# Altium PCB dev_board_layout.PcbDoc (part 2 of 3)
Units mm, origin at the board's own origin, x right, y up, seen from the top; angles counter-clockwise.
Board outline 75.44 x 30.86 mm, 2 copper layers (Top Layer, Bottom Layer); 166 components, 99 nets, 533 pads, 297 vias.
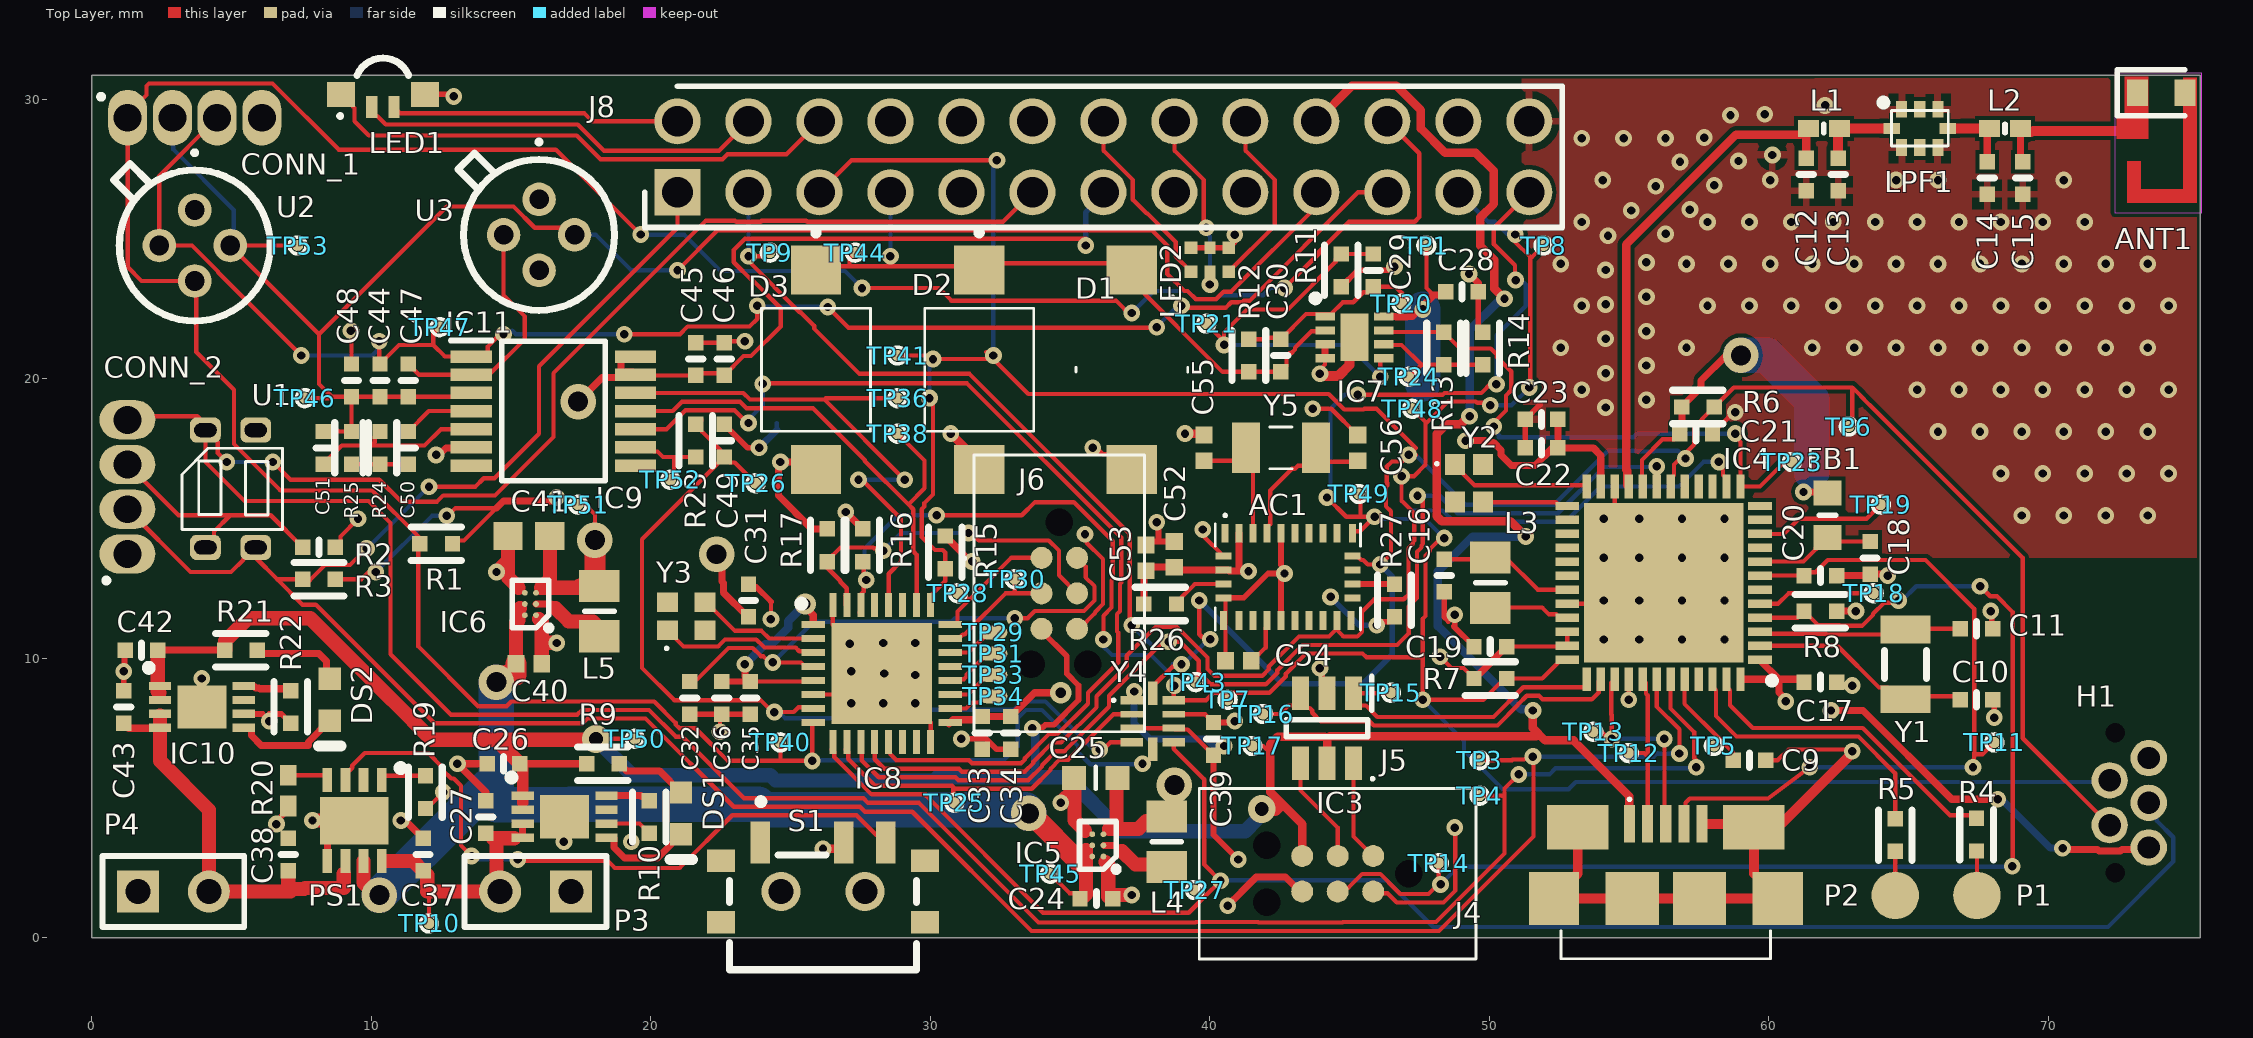
[diagram p0: Top Layer view]

## Part data (continued)
R19: library part ERJ-2GEJ105X, "RES SMD 1M OHM 5% 1/10W 0402", Digi-Key Part Number=P1.0MJCT-ND, Manufacturer="Panasonic Electronic Components", Operating Temperature="-55°C ~ 155°C", Package / Case="0402 (1005 Metric)", Power (Watts)="0.1W, 1/10W", Supplier Device Package=0402, Temperature Coefficient=±200ppm/°C, Tolerance=±5%, @ qty=1500, Composition="Thick Film", Datasheets=http://industrial.panasonic.com/www-cgi/jvcr13pz.cgi?E+PZ+3+AOA0001+ERJ2GEJ105X+7+WW, Factory Stock=0, Failure Rate=-, Features="Automotive AEC-Q200", Height - Seated (Max)="0.016\" (0.40mm)", Image=//media.digikey.com/Photos/Panasonic%20Photos/ERJ-PA2-Series.jpg, Minimum Quantity=1, Number of Terminations=2, Packaging="Cut Tape (CT)", Part Number=ERJ-2GEJ105X, Part Status=Active, Quantity Available=1082572, Series=ERJ, Size / Dimension="0.039\" L x 0.020\" W (1.00mm x 0.50mm)", Unit Price (USD)=0.00350
R20: "Resistor", Manufacturer_Name=Panasonic, Mouser Part Number=667-ERJ-2RKF7500X, Allied_Number=70265602, Allied Price/Stock=https://www.alliedelec.com/panasonic-erj-2rkf7500x/70265602/, Datasheet Link=https://industrial.panasonic.com/cdbs/www-data/pdf/RDA0000/AOA0000C86.pdf, Height=0.4mm, Manufacturer_Part_Number=ERJ-2RKF7500X
R24 R25: library part ERJ-2GEJ164X, "RES SMD 160K OHM 5% 1/10W 0402", Digi-Key Part Number=P160KJCT-ND, Manufacturer="Panasonic Electronic Components", Operating Temperature="-55°C ~ 155°C", Package / Case="0402 (1005 Metric)", Power (Watts)="0.1W, 1/10W", Supplier Device Package=0402, Temperature Coefficient=±200ppm/°C, Tolerance=±5%, @ qty=1500, Composition="Thick Film", Datasheets=http://industrial.panasonic.com/www-cgi/jvcr13pz.cgi?E+PZ+3+AOA0001+ERJ2GEJ164X+7+WW, Factory Stock=0, Failure Rate=-, Features="Automotive AEC-Q200", Height - Seated (Max)="0.016\" (0.40mm)", Image=//media.digikey.com/Photos/Panasonic%20Photos/ERJ-PA2-Series.jpg, Minimum Quantity=1, Number of Terminations=2, Packaging="Cut Tape (CT)", Part Number=ERJ-2GEJ164X, Part Status=Active, Quantity Available=64191, Series=ERJ, Size / Dimension="0.039\" L x 0.020\" W (1.00mm x 0.50mm)", Unit Price (USD)=0.00350
R27: library part ERJ-2GEJ103X, "RES SMD 0K OHM 5% 1/10W 0402", Digi-Key Part Number=P10KJCT-ND, Manufacturer="Panasonic Electronic Components", Operating Temperature="-55°C ~ 155°C", Package / Case="0402 (1005 Metric)", Power (Watts)="0.1W, 1/10W", Supplier Device Package=0402, Temperature Coefficient=±200ppm/°C, Tolerance=±5%, @ qty=1500, Composition="Thick Film", Datasheets=http://industrial.panasonic.com/www-cgi/jvcr13pz.cgi?E+PZ+3+AOA0001+ERJ2GEJ103X+7+WW, Factory Stock=0, Failure Rate=-, Features="Automotive AEC-Q200", Height - Seated (Max)="0.016\" (0.40mm)", Image=//media.digikey.com/Photos/Panasonic%20Photos/ERJ-PA2-Series.jpg, Minimum Quantity=1, Number of Terminations=2, Packaging="Cut Tape (CT)", Part Number=ERJ-2GEJ103X, Part Status=Active, Quantity Available=2560215, Series=ERJ, Size / Dimension="0.039\" L x 0.020\" W (1.00mm x 0.50mm)", Unit Price (USD)=0.00350
S1: "Switch", Manufacturer_Name="C & K COMPONENTS", Mouser Part Number=611-PCM12SMTR, RS Part Number=7931721P, Allied_Number=70417448, Allied Price/Stock=https://www.alliedelec.com/c-k-pcm12smtr/70417448/, Datasheet Link=http://www.farnell.com/datasheets/1789487.pdf, Manufacturer_Part_Number=PCM12SMTR, Mouser Price/Stock=https://www.mouser.com/Search/Refine.aspx?Keyword=611-PCM12SMTR, RS Price/Stock=http://uk.rs-online.com/web/p/products/7931721P
U1: "IR Emitter and Receiver"
U2 U3: "Undefined or Miscellaneous", Manufacturer_Name="Amphenol Advanced Sensors", Mouser Part Number=527-ZTP-135SR, Allied_Number=70282698, Allied Price/Stock=https://www.alliedelec.com/amphenol-advanced-sensors-ztp-135sr/70282698/, Datasheet Link=https://www.amphenol-sensors.com/en/component/edocman/370-thermopile-ir-sensor-applications/download?Itemid=7967, Manufacturer_Part_Number=ZTP-135SR, Mouser Price/Stock=https://www.mouser.com/Search/Refine.aspx?Keyword=527-ZTP-135SR
Y1: "Crystal or Oscillator", Manufacturer_Name=NDK, Mouser Part Number=344-NX3215SA32768K8, Datasheet Link=http://www.ndk.com/images/products/catalog/c_NX3215SA-STD-MUA-14_e.pdf, Manufacturer_Part_Number=NX3215SA-32.768K-STD-MUA-8, Mouser Price/Stock=https://www.mouser.com/Search/Refine.aspx?Keyword=344-NX3215SA32768K8
Y2 Y3: "Crystal or Oscillator", Manufacturer_Name="Murata Electronics", Mouser Part Number=81-XRCGB32M000F1H01R, Datasheet Link=https://www.murata.com/en-eu/products/productdetail?partno=XRCGB32M000F1H01R0, Height=0.7mm, Manufacturer_Part_Number=XRCGB32M000F1H01R0, Mouser Price/Stock=https://www.mouser.com/Search/Refine.aspx?Keyword=81-XRCGB32M000F1H01R
Y4: "Crystal or Oscillator", Manufacturer_Name="Texas Instruments", Mouser Part Number=595-ADS1015IRUGT, RS Part Number=7321496, Datasheet Link=http://www.ti.com/lit/ds/symlink/ads1015.pdf, Height=0mm, Manufacturer_Part_Number=ADS1015IRUGT, Mouser Price/Stock=https://www.mouser.com/Search/Refine.aspx?Keyword=595-ADS1015IRUGT, RS Price/Stock=https://uk.rs-online.com/web/p/products/7321496
Y5: library part FC-135_32.7680KA-A3, "Crystal or Oscillator", Manufacturer_Name="Epson Timing", Manufacturer_Part_Number="FC-135 32.7680KA-A5", Mouser Part Number=732-FC135-32.76KAA3, Datasheet Link=https://support.epson.biz/td/api/doc_check.php?dl=brief_fc-135r_en.pdf, Height=0mm, Mouser Price/Stock=https://www.mouser.com/Search/Refine.aspx?Keyword=732-FC135-32.76KAA3

## Via types
v1: diameter 0.6, hole 0.3, Top Layer to Bottom Layer, tented both sides, 260 vias
v2: diameter 0.6, hole 0.3, Top Layer to Bottom Layer, tented bottom, 25 vias
v3: diameter 1.27, hole 0.711, Top Layer to Bottom Layer, tented both sides, 8 vias
v4: diameter 0.762, hole 0.381, Top Layer to Bottom Layer, tented both sides, 2 vias
v5: diameter 1, hole 0.5, Top Layer to Bottom Layer, tented both sides, 2 vias

## Nets (pads, with @x,y where several pads share a name; then routed paths per layer and width w, separated by ;. In a path a pad name is that pad's centre, name@x,y a point inside that pad or via, vN(x,y) a via of type N, cw(c..) or ccw(c..) an arc to the next point about the centre after c; other vN are vias at no path point)
3.3V_MCU: C17.1 C19.1 C21.1 C22.1 C23.1 C25.2 C28.1 FB1.2 H1.1 IC4.1 IC4.20 IC4.23 IC4.34 IC4.35 IC4.40 IC4.48 IC5.C1 IC7.8 J5.2 L4.2 R6.2 R7.2 TP1.1 | length 63.3
  Top Layer w0.152: 37.725,4.164 L4.2@38.45,4.164 ; L4.2@38.462,4.329 38.227,4.564 38.735,5.072 v3(38.735,5.461) ; J5.2@45.847,1.651 45.91,1.588 46.359,1.588 46.69,1.257 48.36,1.257 48.789,1.686 v1@48.789,3.704 ; TP1.1@47.752,24.765 47.752,23.241 48.006,22.987 ; v1(48.242,10.051) 48.646,9.647 49.078,9.647 R7.2@49.454,9.271 49.653,9.47 R7.2@49.678,9.47 ; C19.1@50.622,10.414 52.758,10.414 IC4.35@52.79,10.446 IC4.34@52.79,10.946 ; v1(54.991,8.509) IC4.40@54.99,9.246 ; IC4.20@55.49,16.146 55.462,16.174 55.462,17.094 56.204,17.835 56.621,17.835 C21.1@56.82,18.034
  Top Layer w0.254: IC7.8@46.228,22.225 46.639,22.225 46.659,22.205 47.056,22.205 47.076,22.225 47.244,22.225 v1@47.561,22.543 ; v1(47.625,22.479) v1@47.561,22.543 ; C28.1@48.438,23.114 48.311,22.987 48.006,22.987 v1@47.561,22.543 ; v1(49.149,17.781) 49.853,17.781 49.925,17.709 50.16,17.709 50.419,17.449 50.419,17.267 50.795,16.891 51.638,16.891 C22.1@52.273,17.526 ; R7.2@49.678,9.47 C19.1@50.622,10.414 ; C23.1@52.455,18.542 C22.1@52.455,17.526 53.721,17.526 53.99,17.257 IC4.23@53.99,16.146 ; C21.1@56.82,18.034 56.893,18.107 56.893,18.987 R6.2@56.883,18.986 57.582,19.685 57.582,19.932 58.483,20.833 v3(59.007,20.833) ; IC4.48@58.99,9.246 60.365,9.246 ; IC4.1@59.69,9.946 59.69,9.921 60.365,9.246 ; v1(60.61,8.453) 60.61,8.521 60.365,8.766 60.365,9.246 ; v1(61.245,15.946) 62.07,15.946 FB1.2@62.103,15.913 ; C17.1@61.265,9.144 61.163,9.246 60.365,9.246 ; v1(62.23,8.128) 63.373,8.128 66.548,4.953 v1(68.199,4.953) ; v1@70.513,3.147 71.762,3.147 71.813,3.097 72.583,3.097 72.634,3.147 73.519,3.147 H1.1@73.598,3.226
  Top Layer w0.508: C25.2@36.66,5.677 36.66,4.141 36.401,3.882 37.443,3.882 37.725,4.164
  Bottom Layer w0.254: v1(68.199,4.953) 68.326,4.953 70.078,3.201 70.511,3.201 v1(70.516,3.196)
  Bottom Layer w1.27: 47.625,19.812 v1(47.625,22.479) ; v3(59.007,20.833) 59.939,20.833 61.531,19.241 61.531,16.637
  other v1: 48.768,3.937
3.3V_PWR: AC1.3 AC1.28 C31.2 C33.1 C34.2 C35.2 C36.2 C39.1 C41.2 C45.2 C46.1 C52.1 C53.1 IC8.1 IC8.5 IC8.17 IC9.C1 IC11.13 IC11.14 J8.13 L5.2 R1.2 R3.2 R15.2 R16.2 R26.2 TP51.1 Y4.8 | length 72.9
  Top Layer w0.152: R3.2@8.712,12.827 9.652,12.827 9.906,13.081 v1(10.16,13.081) ; v1(12.7,15.092) 12.738,15.092 13.013,15.367 14.478,15.367 13.318,14.207 13.013,14.207 R1.2@12.903,14.097 ; 17.653,15.494 18.003,15.144 v3(18.003,14.224) ; IC11.13@19.453,20.141 19.477,20.117 C45.2@21.612,20.117 21.688,20.193 22.552,20.193 C46.1@22.628,20.117 23.319,20.807 23.587,20.807 24.648,21.868 24.648,22.518 23.671,23.495 23.636,23.495 22.966,24.165 22.966,24.603 23.37,25.007 35.572,25.007 35.56,24.995 v1(35.56,24.765) ; C35.2@23.368,9.347 C35.2@23.552,9.163 25.776,9.163 IC8.5@25.813,9.2 ; v1(26.979,15.23) v1@26.979,15.312 ; v1@31.445,13.462 v1(31.496,13.462) ; C53.1@37.592,13.256 C53.1@37.643,13.205 ; Y4.8@38.711,7.993 39.835,7.993 C39.1@40.132,7.696 ; C52.1@38.735,13.256 C52.1@38.835,13.156 ; v1@40.843,7.696 v1(40.894,7.747)
  Top Layer w0.203: C36.2@22.536,9.163 C35.2@23.552,9.163 ; C39.1@40.132,7.696 v1@40.843,7.696
  Top Layer w0.254: 14.478,15.367 14.732,15.621 v1@16.51,15.621 ; C41.2@16.39,14.37 C41.2@16.515,14.37 ; v3(17.399,19.177) 18.265,20.043 18.843,20.043 18.937,20.137 18.937,20.239 IC11.13@19.355,20.239 ; L5.2@18.003,12.742 L5.2@18.161,12.584 ; IC11.13@18.937,20.334 18.937,20.693 19.035,20.791 IC11.14@19.453,20.791 ; v3(22.352,13.716) 22.546,13.522 22.546,12.739 22.596,12.689 22.596,12.349 C31.2@23.437,11.508 ; C35.2@23.368,9.347 v1(23.368,9.779) ; v4(25.527,11.938) 25.527,11.83 25.813,11.544 IC8.1@25.813,11.2 ; v1(26.979,15.23) R16.2@27.585,14.624 ; R15.2@30.537,14.37 v1@31.445,13.462 ; IC8.17@30.664,7.651 IC8.17@30.713,7.7 30.809,7.796 31.749,7.796 C33.1@31.865,7.912 C34.2@32.881,7.912 33.732,8.763 v4(34.671,8.763) ; C53.1@37.592,13.256 C52.1@38.735,13.256 ; R26.2@37.643,11.938 C53.1@37.643,13.205 ; C52.1@38.835,13.156 AC1.3@40.486,13.156 40.645,13.156 40.688,13.113 41.053,13.113 ; AC1.28@41.049,14.468 41.051,14.466 41.051,14.183 41.053,14.181 41.053,13.113 ; v1(41.386,13.113) 41.053,13.113
  Top Layer w0.508: 16.39,12.666 16.39,12.834 ; C41.2@16.39,14.37 16.39,12.834 ; L5.2@17.78,12.954 17.78,12.603 17.455,12.603 17.37,12.518 16.074,12.518 16.39,12.834
  Top Layer w0.762: L5.2@18.003,12.742 v3(18.003,14.224)
  Bottom Layer w0.152: v1(10.16,13.081) 12.172,15.093 v1(12.7,15.092)
  Bottom Layer w0.203: v1(35.56,24.765) 35.56,25.941 36.195,26.576 J8.13@36.195,26.67
  Bottom Layer w0.305: v1(23.368,9.779) 24.094,10.505 24.333,10.505 24.913,11.084 24.913,11.324 v4(25.527,11.938)
  other v1: 16.637,15.748
5V: C26.1 C42.1 IC3.5 IC6.1 IC6.2 IC10.1 IC10.2 J4.1 J5.5 J6.5 J8.20 R9.2 R21.2 TP17.1 TP50.1 | length 117.3
  Top Layer w0.152: C26.1@15.415,6.22 C26.1@15.418,6.223 ; v5(18.034,7.112) TP50.1@19.431,7.112 ; J6.5@33.983,10.975 J6.5@33.983,11.049 ; TP17.1@41.529,6.858 41.91,6.858 42.164,6.604
  Top Layer w0.203: v1(33.655,7.493) 33.693,7.531 34.029,7.531 34.112,7.613 34.419,7.613 35.306,8.5 35.306,9.026 34.884,9.448 34.884,10.074 J6.5@33.983,10.975
  Top Layer w0.254: C42.1@2.362,10.287 R21.2@4.75,10.287 ; C26.1@15.316,6.223 15.418,6.223 R9.2@17.704,6.223
  Top Layer w0.305: J5.5@43.307,2.921 43.307,4.064 42.164,5.207 42.164,6.604 42.164,6.923 42.434,7.193 44.107,7.193 44.196,7.104 ; J8.20@43.815,29.207 45.088,30.48 46.68,30.48 47.553,29.606 47.553,28.951 48.427,28.077 49.52,28.077 50.165,27.432 50.165,26.255 49.687,25.778 49.687,24.748 50.186,24.249 50.186,23.22 v1(50.546,22.86) ; IC3.5@44.196,6.243 44.196,7.104 ; v1(49.297,18.658) 49.265,18.658 48.979,18.372 48.471,18.372 48.121,18.022 48.121,15.08 48.3,14.901 50.758,14.901 v1(51.308,14.351) ; v1(51.562,8.128) 51.562,7.493 51.999,7.056 53.015,7.056 55.018,5.053 J4.1@55.018,4.072 ; 51.689,7.209 44.301,7.209 44.196,7.104
  Top Layer w0.406: 15.415,4.826 IC6.1@15.415,5.08 C26.1@15.415,6.22
  Top Layer w0.508: C42.1@2.362,10.287 2.362,8.814 2.413,8.763 ; R21.2@4.75,10.287 4.771,10.308 4.771,10.613 5.588,11.43 7.813,11.43 10.732,8.51 10.736,8.51 12.163,7.083 14.456,7.083 ; C26.1@15.316,6.223 14.456,7.083 ; v5(18.034,7.112) 18.005,7.083 14.456,7.083 ; v5(41.86,4.607) 42.326,4.607 42.418,4.699
  Bottom Layer w0.305: 33.76,5.74 v1@33.76,7.493 ; v1(49.297,18.658) 49.297,21.738 50.292,22.733 50.419,22.733 v1(50.546,22.86) ; v1(51.308,14.351) 49.403,14.351 48.163,13.111 48.163,11.146 51.141,8.168 51.522,8.168 v1(51.562,8.128)
  Bottom Layer w0.508: v5(18.034,7.112) 19.334,5.812 24.273,5.812 24.466,5.619 30.133,5.619 30.255,5.74 33.76,5.74 34.9,5.74 36.83,3.81 41.27,3.81 v5@41.663,4.204
ADC_ALERT: IC8.10 TP25.1 Y4.2 | length 12.7
  Top Layer w0.152: IC8.10@26.977,6.736 27.062,6.651 27.062,6.399 28.029,5.432 30.775,5.432 30.823,5.385 ; TP25.1@30.861,4.826 30.823,4.864 30.823,5.385 ; Y4.2@37.211,7.993 36.559,7.993 34.935,6.369 34.627,6.369 34.299,6.04 34.299,5.995 33.629,5.325 30.882,5.325 30.823,5.385
AFE_A0: C50.1 IC11.4 | length 2.6
  Top Layer w0.152: C50.1@11.325,18.11 12.056,18.841 IC11.4@13.577,18.841
AFE_A1: C51.1 IC11.5 R24.2 | length 6.5
  Top Layer w0.152: C51.1@8.277,16.942 8.942,17.607 10.004,17.607 ; R24.2@10.408,18.011 10.224,18.011 10.124,17.911 10.124,17.727 10.004,17.607 ; IC11.5@13.577,18.191 12.49,18.191 11.906,17.607 10.004,17.607
ANALOG_EXP_CONN: H1.3 IC8.9 TP27.1 Y4.6 | length 61.3
  Top Layer w0.152: IC8.9@26.477,6.736 26.562,6.651 26.562,6.468 27.902,5.127 29.845,5.127 29.845,5.08 34.032,0.893 39.247,0.893 39.817,1.463 ; Y4.6@38.711,6.993 38.711,6.755 39.802,5.664 39.802,2.616 v1(40.386,2.032) 39.817,1.463 ; TP27.1@39.462,1.704 39.529,1.704 39.623,1.61 39.669,1.61 39.817,1.463
  Bottom Layer w0.152: v1@40.386,1.994 40.444,2.053 46.326,2.053 47.998,0.381 72.136,0.381 74.477,2.722 74.477,3.59 73.888,4.178 73.888,4.225 73.598,4.515 H1.3@73.598,4.826
BATTERY_1: J8.9
BLINK_CATHODE: CONN_2.3 R2.2 U1.2 | length 9
  Top Layer w0.152: CONN_2.3@1.283,16.929 3.099,15.113 4.953,15.113 ; CONN_2.3@1.524,17.056 CONN_2.3@1.537,17.056 ; U1.2@4.064,13.961 4.376,14.273 4.376,14.536 4.953,15.113 ; R2.2@7.544,13.97 6.401,15.113 4.953,15.113
BLINK_PWM: CONN_2.4 IC4.43 J8.11 TP4.1 U1.1 | length 112.1
  Top Layer w0.152: CONN_2.4@1.524,18.656 3.769,18.656 4.137,18.288 U1.1@4.318,18.288 ; v1(4.826,17.018) 4.507,17.337 4.507,17.737 4.083,18.161 U1.1@4.064,18.161 4.064,17.018 5.461,15.621 9.906,15.621 10.689,14.838 10.689,10.139 12.852,7.976 17.365,7.976 17.535,8.145 19.938,8.145 20.897,7.186 21.135,7.186 23.332,4.989 27.609,4.989 27.776,4.822 29.595,4.822 33.871,0.546 39.497,0.546 39.51,0.559 41.724,0.559 41.737,0.546 44.749,0.546 44.762,0.559 48.092,0.559 50.546,3.012 50.546,5.08 ; v1(6.477,17.018) 7.112,16.383 10.287,16.383 11.07,15.6 12.347,15.6 12.571,15.824 14.427,15.824 16.515,17.912 16.515,20.198 21.971,25.654 23.016,25.654 23.054,25.616 23.931,25.616 23.964,25.649 25.566,25.649 25.599,25.616 32.601,25.616 J8.11@33.655,26.67 ; TP4.1@49.657,5.08 50.546,5.08 ; v1(51.054,5.842) 50.546,5.334 50.546,5.08 ; IC4.43@56.49,9.246 56.49,8.203 57.332,7.361 57.332,6.422 57.404,6.35 v1(57.404,6.096)
  Bottom Layer w0.152: v1(4.826,17.018) v1(6.477,17.018) ; v1(51.054,5.842) 52.153,5.842 52.372,6.062 57.37,6.062 v1(57.404,6.096)